# Altium PCB isg_adc_dac_test_board_top.PcbDoc
Units mil, origin at the board's own origin, x right, y up, seen from the top; angles counter-clockwise.
Board outline 3000 x 3000 mil, 4 copper layers (Top Layer, MidLayer Upper, MidLayer Lower, Bottom Layer), stack 23.756 mil thick; 95 components, 50 nets, 273 pads, 94 vias.
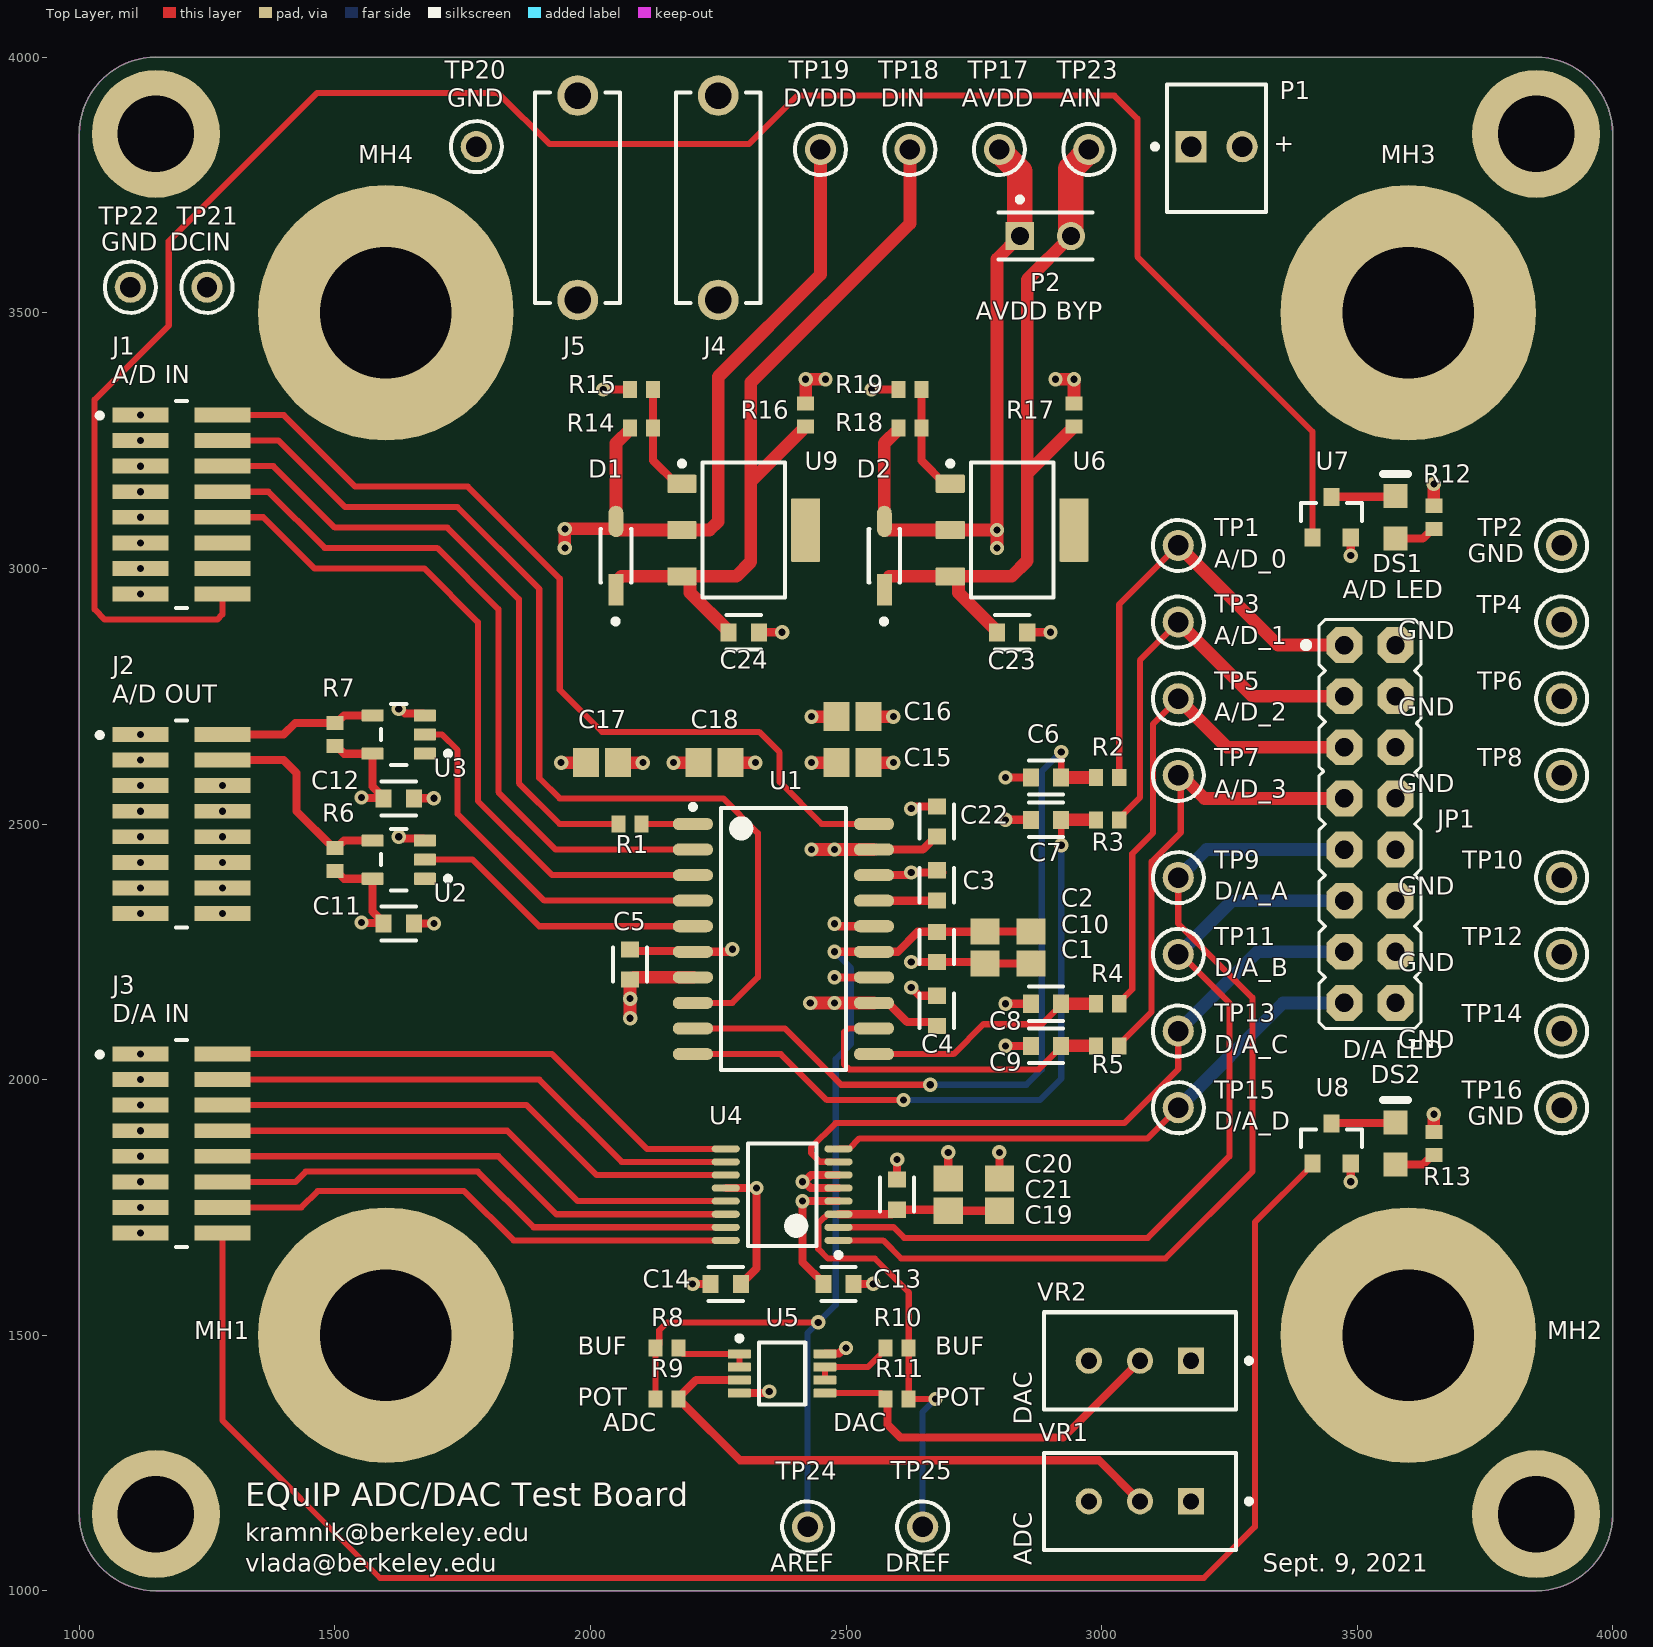
[diagram p0: Top Layer view]
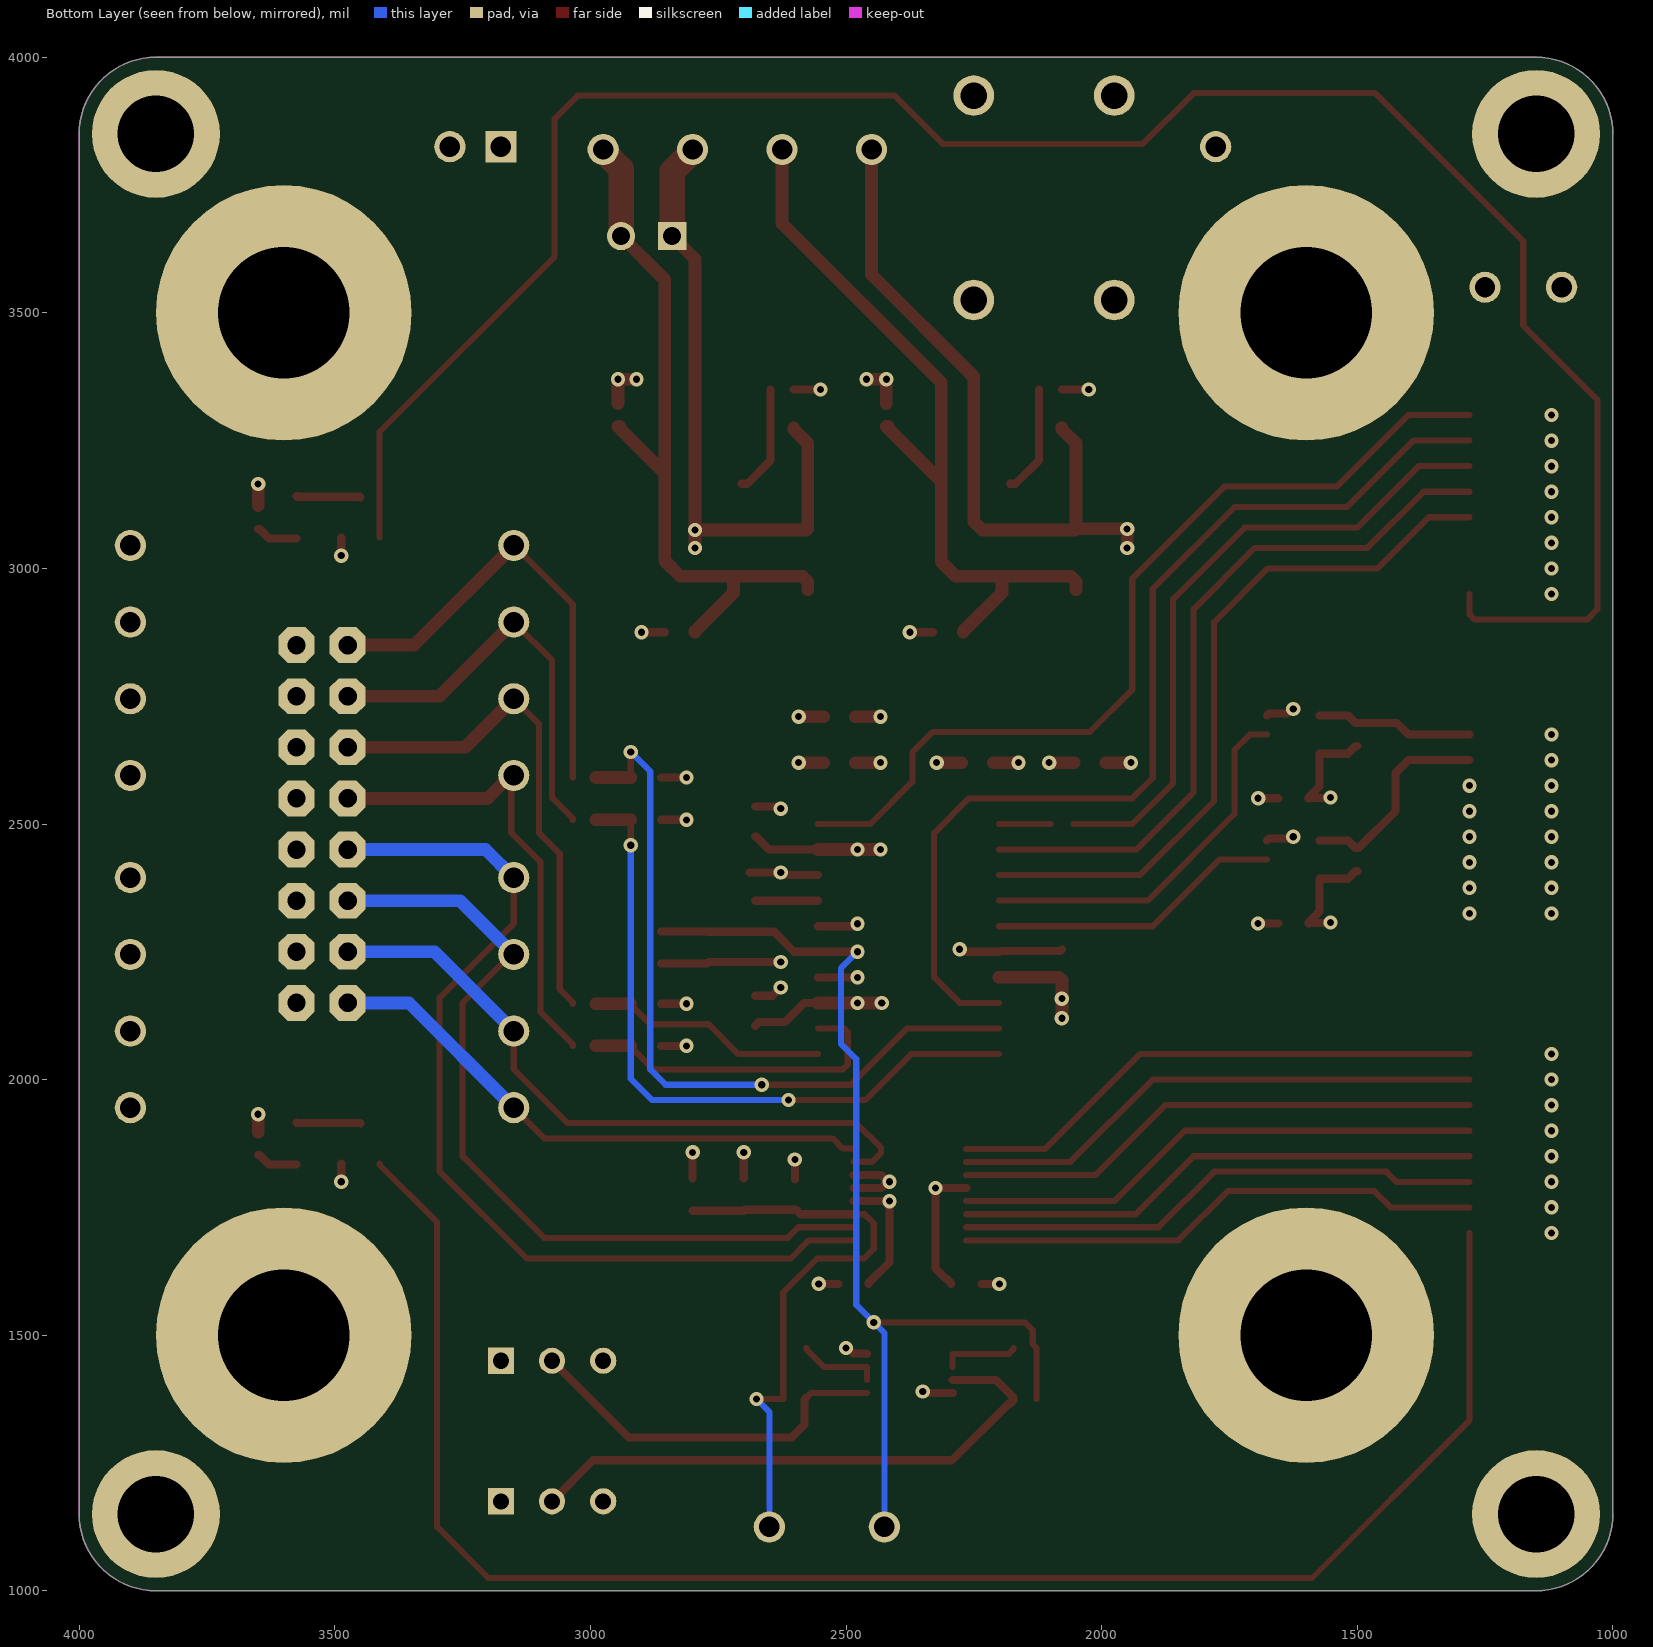
[diagram p1: Bottom Layer view, seen from below]
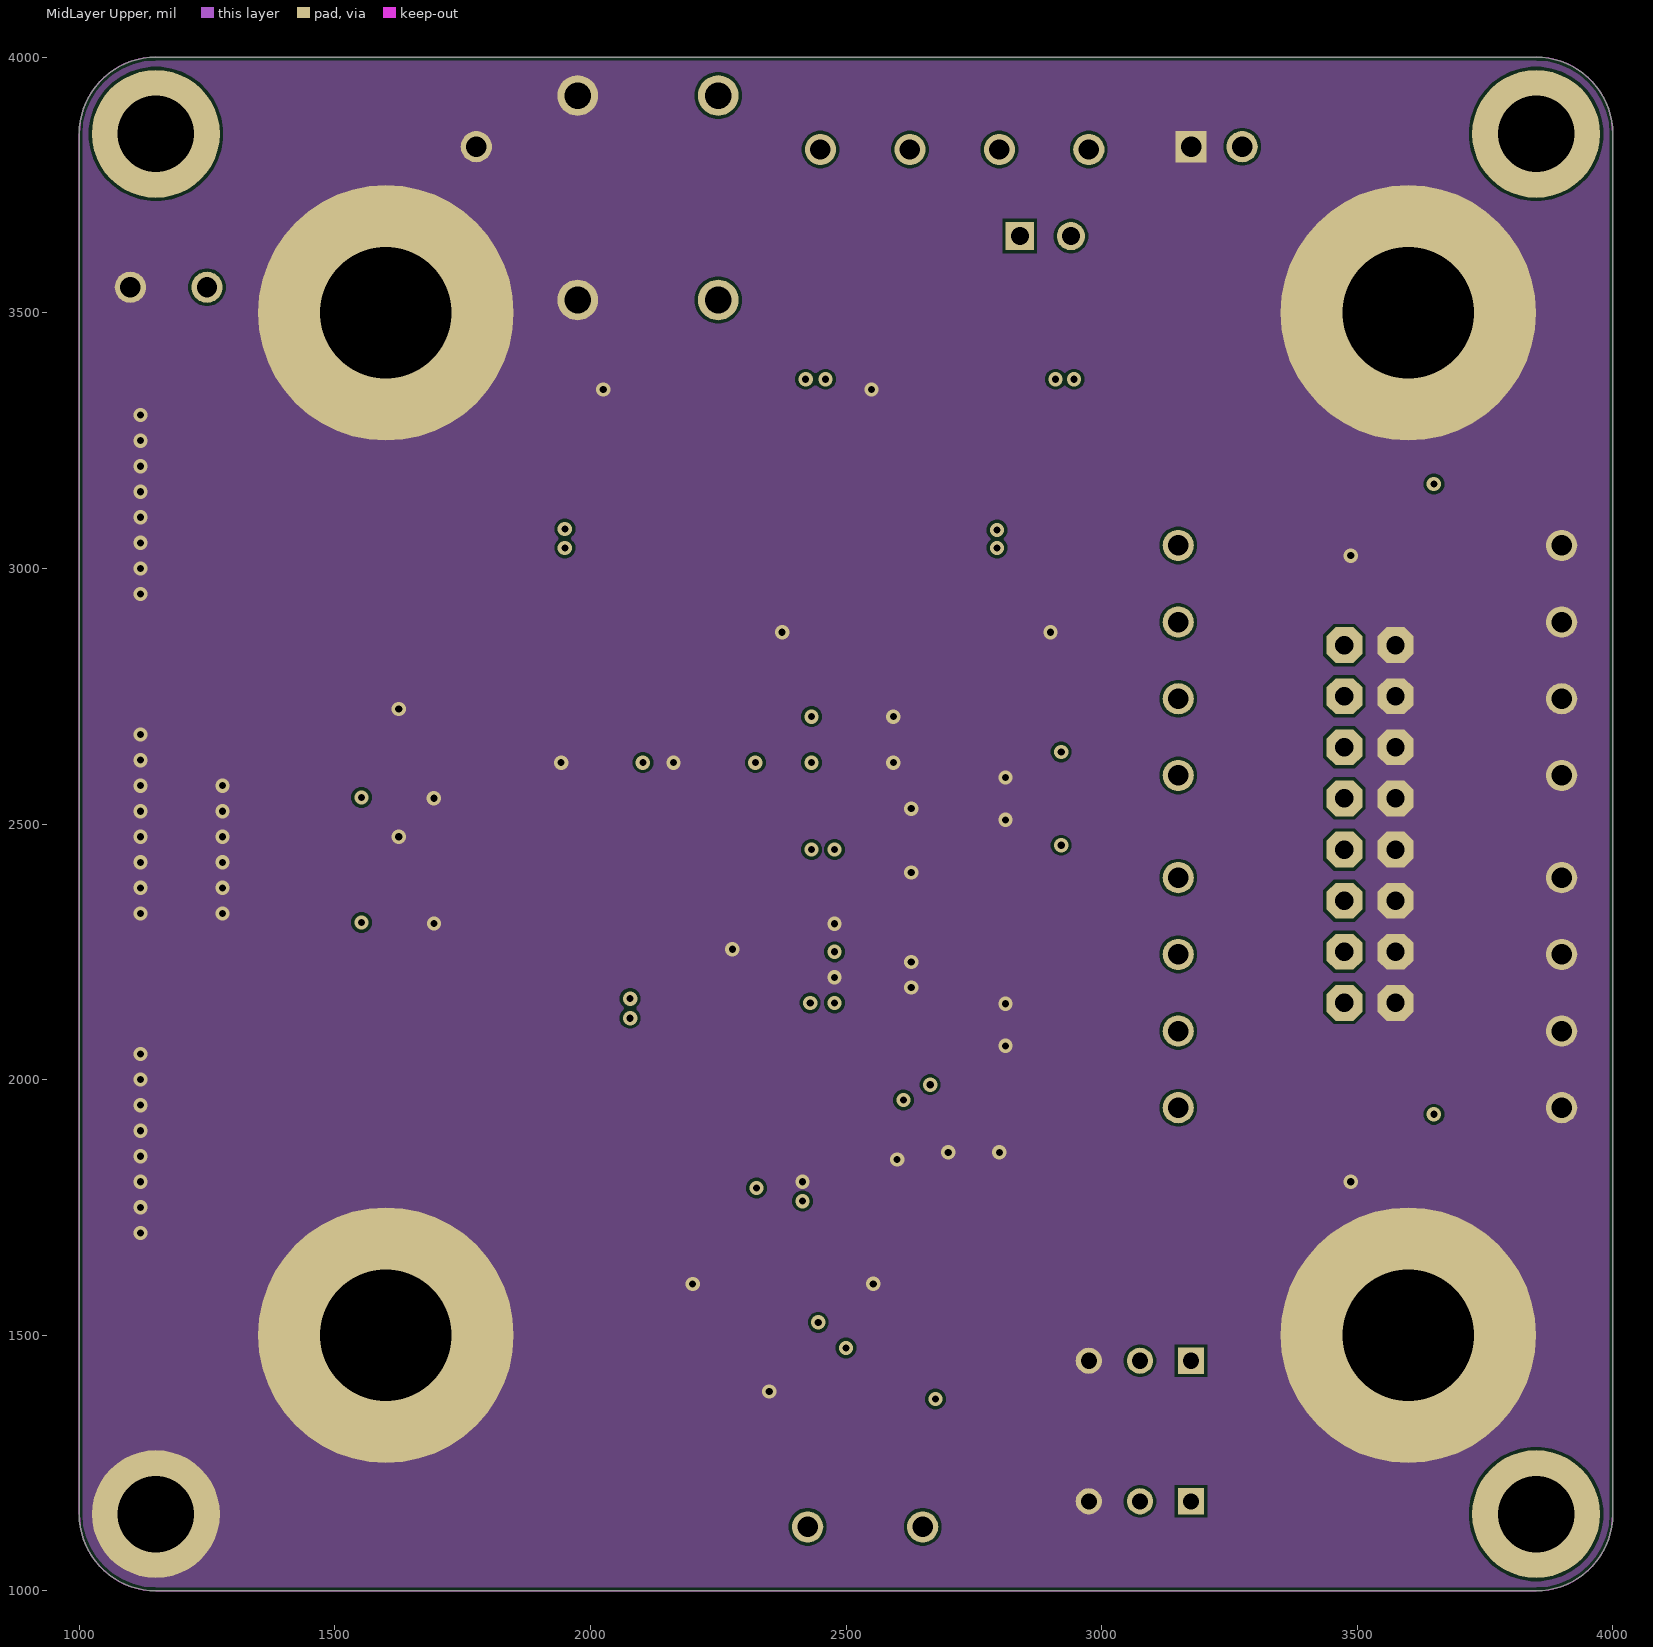
[diagram p2: MidLayer Upper]
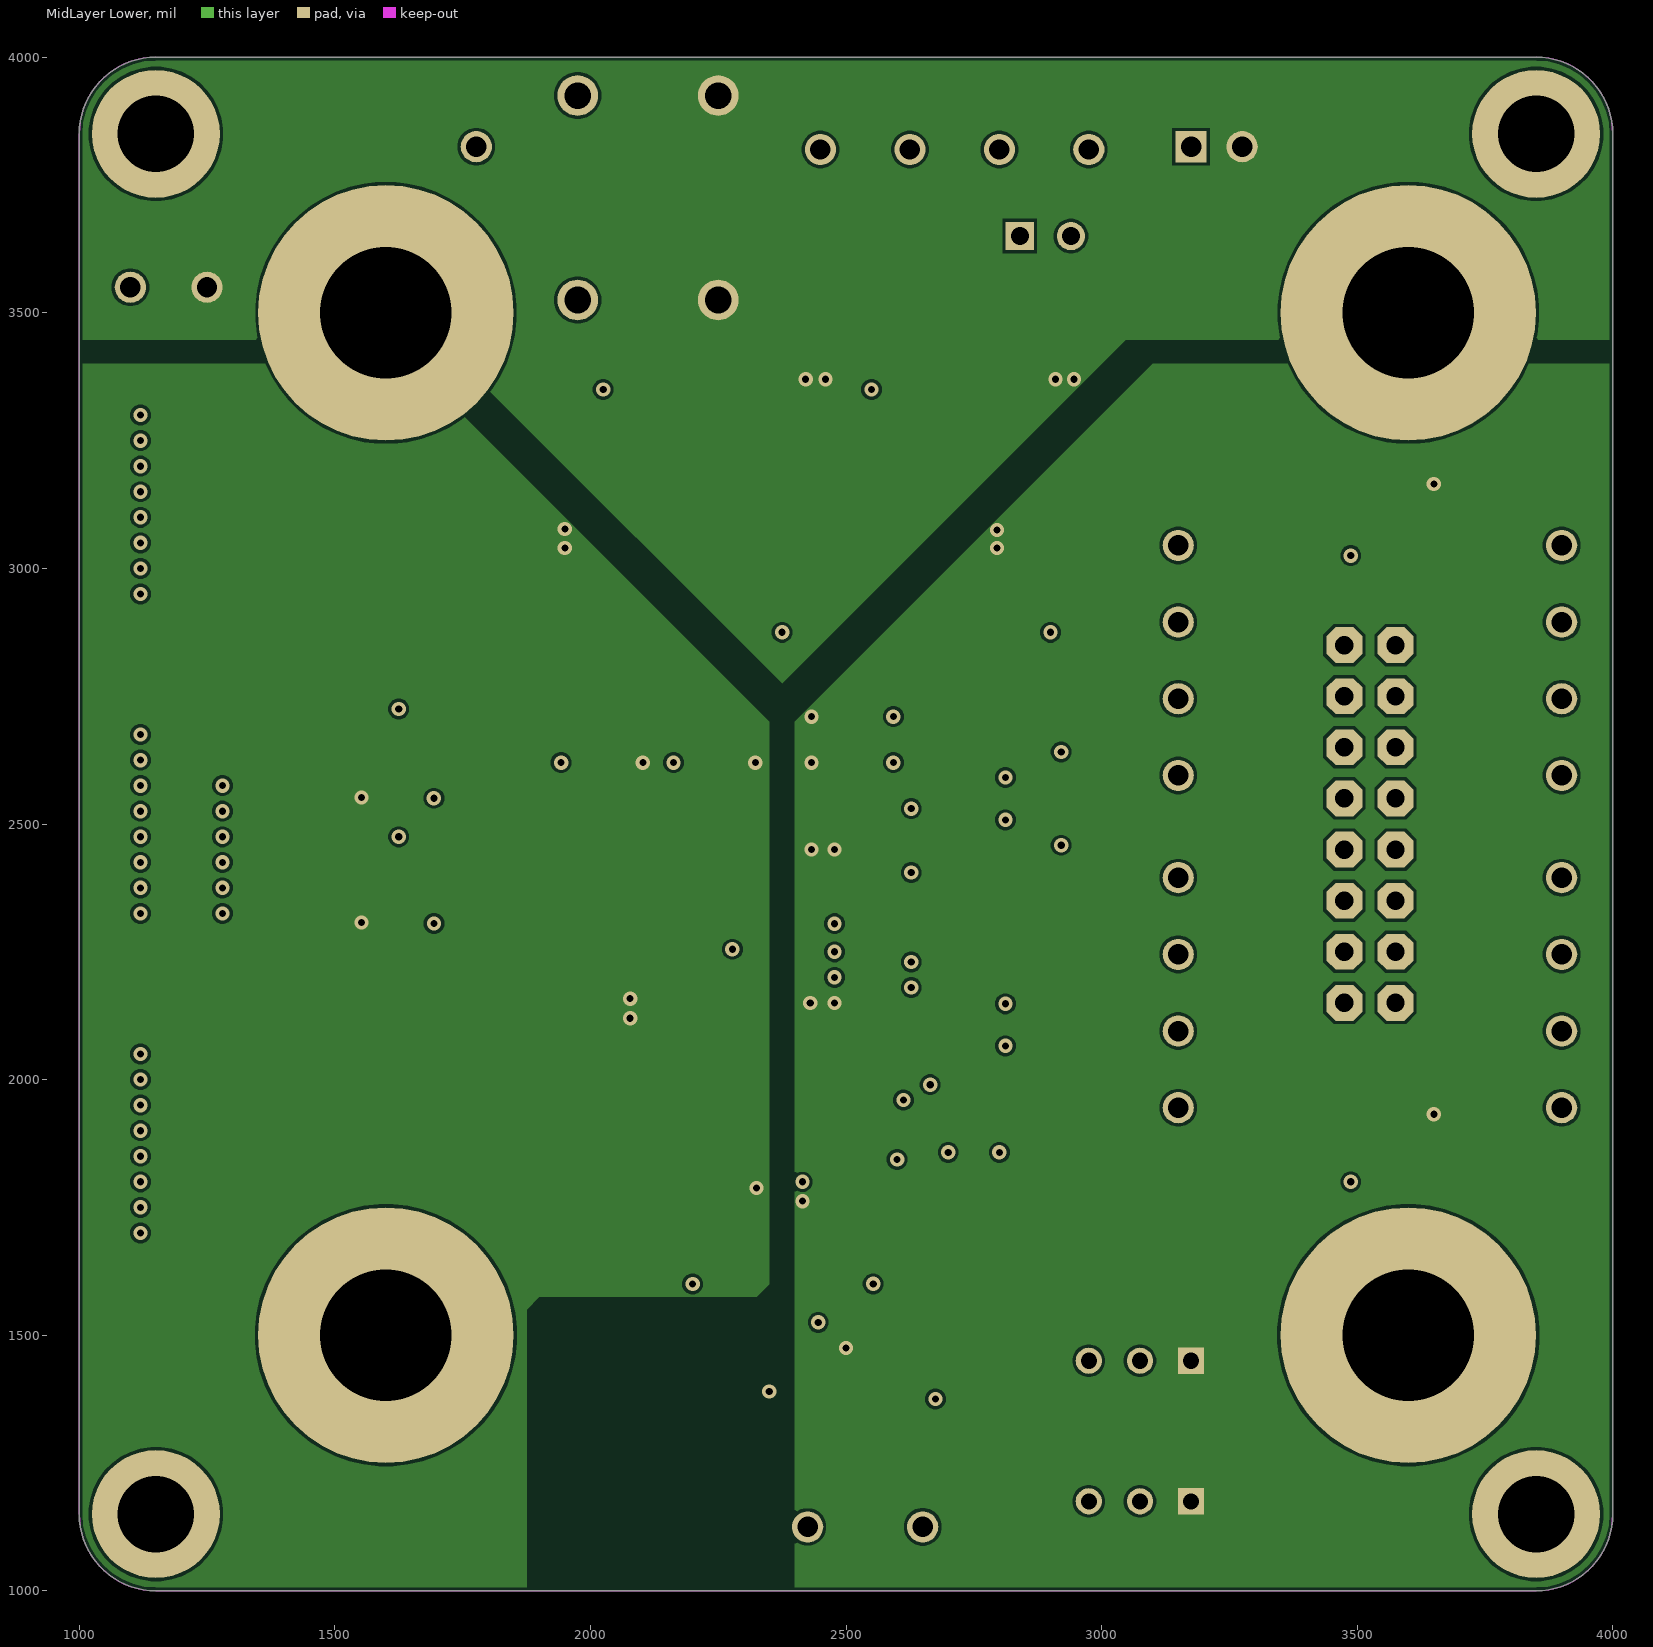
[diagram p3: MidLayer Lower]
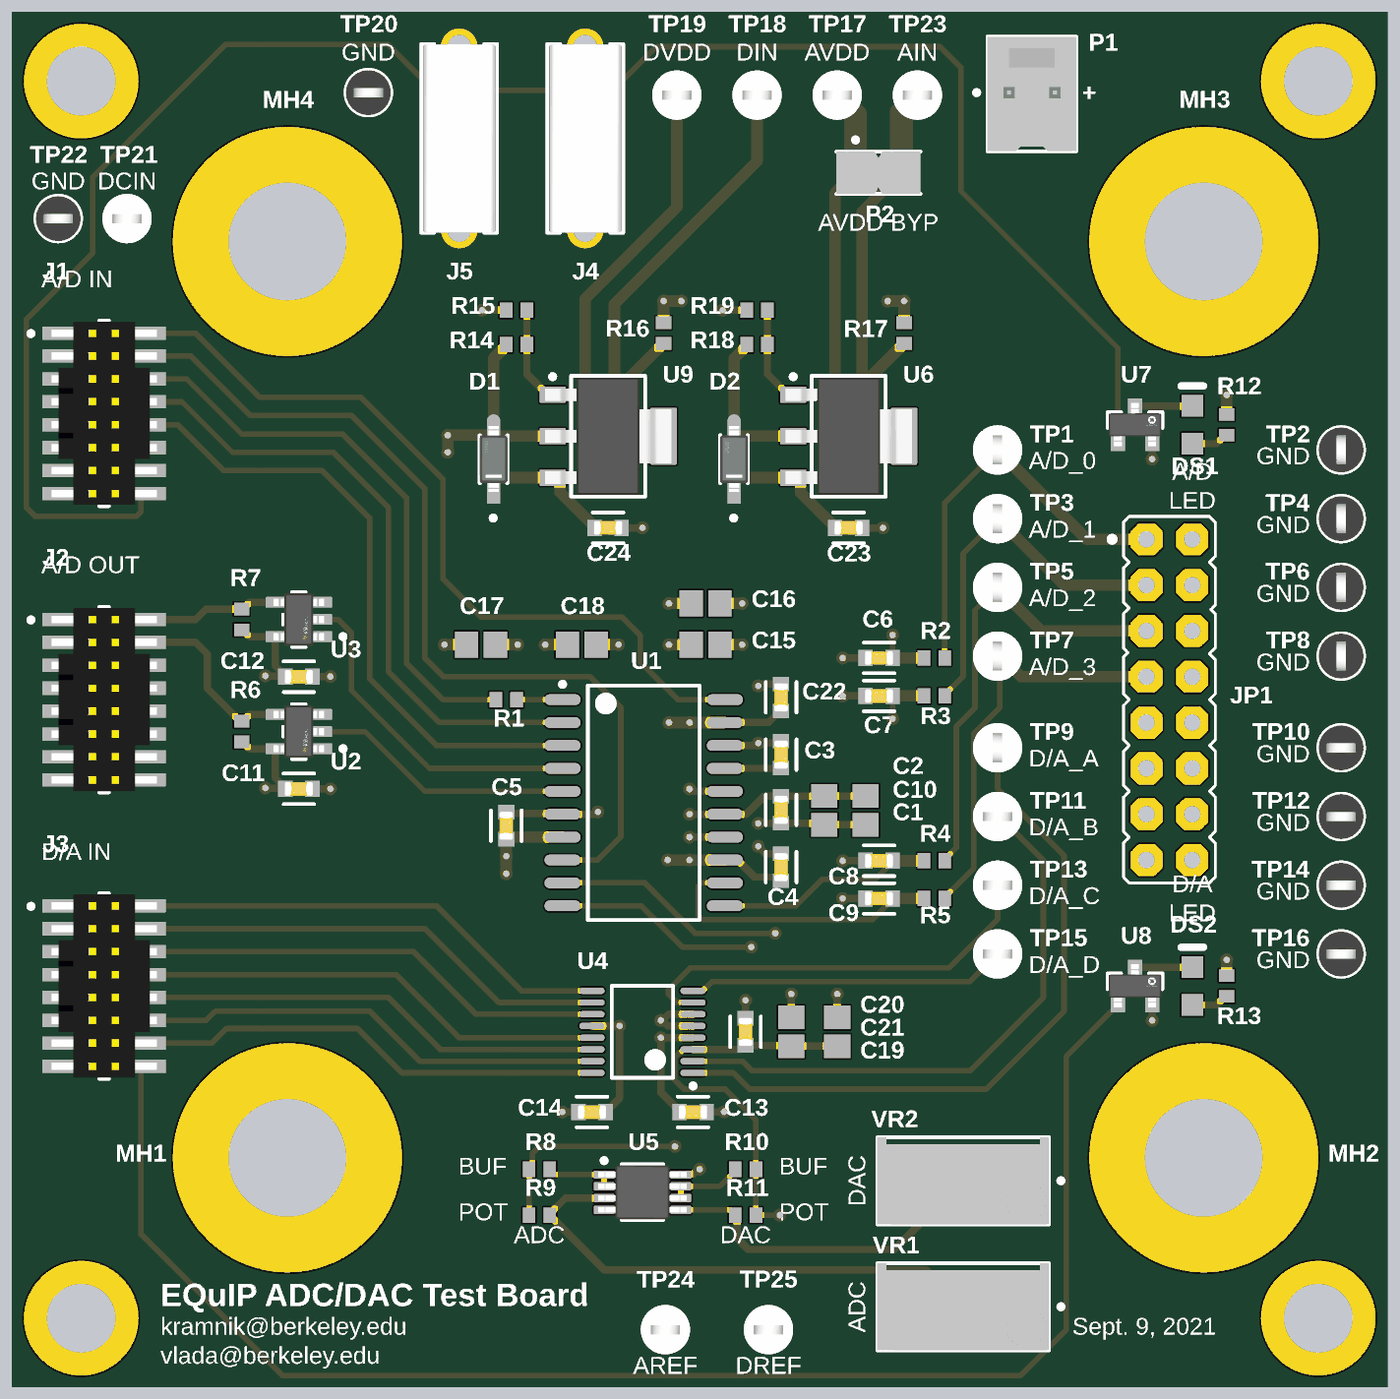
[diagram p4: 3D render of the assembled board from above, using the file's embedded part models]

## Layer stack, top to bottom
Top Solder: solder mask 0.4, Solder Resist, Dk 3.5
Top Layer: signal copper 1.4
Dielectric 2: prepreg 2.8, PP-006, Dk 4.1
MidLayer Upper: signal copper 1.378
Dielectric 1: dielectric 12.6, FR-4, Dk 4.8
MidLayer Lower: signal copper 1.378
Dielectric 3: prepreg 2.8, PP-006, Dk 4.1
Bottom Layer: signal copper 1.4
Bottom Solder: solder mask 0.4, Solder Resist, Dk 3.5

## Board outline
1150,4000 ccw(c1150,3850) 1000,3850 1000,1150 ccw(c1150,1150) 1150,1000 3850,1000 ccw(c3850,1150) 4000,1150 4000,3850 ccw(c3850,3850) 3850,4000

## Design rules (kind name [scope] priority, off if disabled: settings)
Clearance [All] p1: gap=6 ignorepadtopadclearanceinfootprint=FALSE
HoleSize [All] p1: absolutevalues=TRUE maxlimit=1000 minlimit=11.81 maxpercent=80.000 minpercent=20.000
PlaneConnect [All] p1: planeconnectstyle=Direct reliefexpansion=20 reliefentries=4 reliefconductorwidth=10 reliefairgap=10
PolygonConnect [All] p1: connectstyle=Direct reliefconductorwidth=10 reliefentries=4 polygonreliefangle="90 Angle" airgapwidth=10
RoutingVias [All] p1: holewidth=28 width=50 viastyle="Through Hole" minholewidth=28 minwidth=50 maxholewidth=28 maxwidth=50
SolderMaskExpansion [All] p1: expansion=4 istentingtop=FALSE
Width [All] p1: maxlimit=100 minlimit=8 preferedwidth=16
28 further rules are at their usual default settings.

## Components (designator, comment, footprint, x,y, rotation, side; value= is the part's Value field where it differs from the comment)
C1 "CAP CER 0.1uF 50V X7R 0603" FP-CC0603-DA-MFG 2677.68,2259.53 r270 top value="100 nF"
C2 "CAP CER 10uF 0805 10V X7R" CAPC2013X140X50NL20T25 2861.93,2258.35 r270 top
C3 "CAP CER 0.1uF 50V X7R 0603" FP-CC0603-DA-MFG 2677.68,2380 r90 top value="100 nF"
C4 "CAP CER 0.1uF 50V X7R 0603" FP-CC0603-DA-MFG 2677.68,2134.53 r90 top value="100 nF"
C5 "CAP CER 0.1uF 50V X7R 0603" FP-CC0603-DA-MFG 2077.68,2225 r90 top value="100 nF"
C6 "CAP CER 0.027uF 50V X7R 0603" FP-CC0603-DA-MFG 2891.46,2591.02 r180 top value="100 nF"
C7 "CAP CER 0.027uF 50V X7R 0603" FP-CC0603-DA-MFG 2891.46,2508.15 r180 top value="100 nF"
C8 "CAP CER 0.027uF 50V X7R 0603" FP-CC0603-DA-MFG 2891.46,2148.31 r180 top value="100 nF"
C9 "CAP CER 0.027uF 50V X7R 0603" FP-CC0603-DA-MFG 2891.46,2066.02 r180 top value="100 nF"
C10 "CAP CER 1uF 0805 16V X7R" CAPC2013X140X50NL20T25 2771.85,2258.35 r270 top
C11 "CAP CER 0.1uF 50V X7R 0603" FP-CC0603-DA-MFG 1625,2305.32 r0 top value="100 nF"
C12 "CAP CER 0.1uF 50V X7R 0603" FP-CC0603-DA-MFG 1625,2550 r0 top value="100 nF"
C13 "CAP CER 0.1uF 50V X7R 0603" FP-CC0603-DA-MFG 2485.24,1600 r0 top value="100 nF"
C14 "CAP CER 0.1uF 50V X7R 0603" FP-CC0603-DA-MFG 2264.76,1600 r180 top value="100 nF"
C15 "CAP CER 1uF 0805 16V X7R" CAPC2013X140X50NL20T25 2512.68,2620 r0 top
C16 "CAP CER 10uF 0805 10V X7R" CAPC2013X140X50NL20T25 2512.68,2710 r0 top
C17 "CAP CER 1uF 0805 16V X7R" CAPC2013X140X50NL20T25 2022.68,2620 r180 top
C18 "CAP CER 10uF 0805 10V X7R" CAPC2013X140X50NL20T25 2242.68,2620 r180 top
C19 "CAP CER 0.1uF 50V X7R 0603" FP-CC0603-DA-MFG 2600,1775 r90 top value="100 nF"
C20 "CAP CER 1uF 0805 16V X7R" CAPC2013X140X50NL20T25 2800,1775 r90 top
C21 "CAP CER 10uF 0805 10V X7R" CAPC2013X140X50NL20T25 2700,1775 r90 top
C22 "CAP CER 0.1uF 50V X7R 0603" FP-CC0603-DA-MFG 2677.68,2505 r90 top value="100 nF"
C23 "CAP CER 0.1uF 50V X7R 0603" FP-CC0603-DA-MFG 2825,2875 r0 top value="100 nF"
C24 "CAP CER 0.1uF 50V X7R 0603" FP-CC0603-DA-MFG 2300,2875 r0 top value="100 nF"
D1 "1N5819HW-7-F" FP-SOD123-IPC_A 2050,3025 r90 top
D2 "1N5819HW-7-F" FP-SOD123-IPC_A 2575,3025 r90 top
DS1 "HSMG-C170" AVAG-HSMX-C170_V 3575,3100 r90 top
DS2 "HSMG-C170" AVAG-HSMX-C170_V 3575,1875 r90 top
J1 "FTSH-108-02-F-DV" FP-FTSH-108-02-F-DV-MFG 1200,3125 r270 top
J2 "FTSH-108-02-F-DV" FP-FTSH-108-02-F-DV-MFG 1200,2500 r270 top
J3 "FTSH-108-02-F-DV" FP-FTSH-108-02-F-DV-MFG 1200,1875 r270 top
J4 "105-0752-001" FP-105-0751-001-MFG 2250,3725 r90 top
J5 "105-0753-001" FP-105-0751-001-MFG 1975,3725 r270 top
JP1 "PIN_HEADER_2X8" PIN_HEADER_2X8_2.54MM 3525,2500 r0 top
MH1 "OPTICAL-MOUNT-HOLE-1/4-20" MH-1/4-20 1600,1500 r0 top
MH2 "OPTICAL-MOUNT-HOLE-1/4-20" MH-1/4-20 3600,1500 r0 top
MH3 "OPTICAL-MOUNT-HOLE-1/4-20" MH-1/4-20 3600,3500 r0 top
MH4 "OPTICAL-MOUNT-HOLE-1/4-20" MH-1/4-20 1600,3500 r0 top
P1 "22-23-2021" MOLX-22-23-2021_V 3225,3825 r0 top
P2 "5-146280-2" TECO-5-146280-2_V 2890,3650 r0 top
R1 "RES SMD 33 OHM 0603" RESC1609X50X30LL10T20 2077.68,2500 r0 top
R2 "RES SMD 33 OHM 0603" RESC1609X50X30LL10T20 3011.93,2591.02 r0 top
R3 "RES SMD 33 OHM 0603" RESC1609X50X30LL10T20 3011.93,2508.15 r0 top
R4 "RES SMD 33 OHM 0603" RESC1609X50X30LL10T20 3011.93,2148.31 r0 top
R5 "RES SMD 33 OHM 0603" RESC1609X50X30LL10T20 3011.93,2066.02 r0 top
R6 "RES SMD 100 OHM 0603" RESC1609X50X30LL10T20 1500,2430.32 r270 top
R7 "RES SMD 100 OHM 0603" RESC1609X50X30LL10T20 1500,2675 r270 top
R8 "RES SMD 0 OHM 0603" RESC1609X50X30LL10T20 2150,1475 r0 top
R9 "DNP" RESC1609X50X30LL10T20 2150,1375 r0 top
R10 "RES SMD 0 OHM 0603" RESC1609X50X30LL10T20 2600,1475 r180 top
R11 "DNP" RESC1609X50X30LL10T20 2600,1375 r180 top
R12 "RES SMD 100 OHM 0603" RESC1609X50X30LL10T20 3650,3100 r90 top
R13 "RES SMD 100 OHM 0603" RESC1609X50X30LL10T20 3650,1875 r90 top
R14 "RES SMD 240 OHM 0603" RESC1609X50X30LL10T20 2100,3275 r180 top
R15 "RES SMD 100 OHM 0603" RESC1609X50X30LL10T20 2100,3350 r0 top
R16 "RES SMD 0 OHM 0603" RESC1609X50X30LL10T20 2421.06,3300 r270 top
R17 "RES SMD 0 OHM 0603" RESC1609X50X30LL10T20 2946.06,3300 r270 top
R18 "RES SMD 240 OHM 0603" RESC1609X50X30LL10T20 2625,3275 r180 top
R19 "RES SMD 100 OHM 0603" RESC1609X50X30LL10T20 2625,3350 r0 top
TP1 "5002" KSTN-5002 3150,3045 r0 top
TP2 "5001" KSTN-5001 3900,3045 r0 top
TP3 "5002" KSTN-5002 3150,2895 r0 top
TP4 "5001" KSTN-5001 3900,2895 r0 top
TP5 "5002" KSTN-5002 3150,2745 r0 top
TP6 "5001" KSTN-5001 3900,2745 r0 top
TP7 "5002" KSTN-5002 3150,2595 r0 top
TP8 "5001" KSTN-5001 3900,2595 r0 top
TP9 "5002" KSTN-5002 3150,2395 r0 top
TP10 "5001" KSTN-5001 3900,2395 r90 top
TP11 "5002" KSTN-5002 3150,2245 r90 top
TP12 "5001" KSTN-5001 3900,2245 r90 top
TP13 "5002" KSTN-5002 3150,2095 r90 top
TP14 "5001" KSTN-5001 3900,2095 r90 top
TP15 "5002" KSTN-5002 3150,1945 r90 top
TP16 "5001" KSTN-5001 3900,1945 r90 top
TP17 "5002" KSTN-5002 2800,3819.49 r90 top
TP18 "5002" KSTN-5002 2625,3819.49 r90 top
TP19 "5002" KSTN-5002 2450,3819.49 r90 top
TP20 "5001" KSTN-5001 1776.78,3825 r90 top
TP21 "5002" KSTN-5002 1250,3550 r90 top
TP22 "5001" KSTN-5001 1100,3550 r90 top
TP23 "5002" KSTN-5002 2975,3819.49 r90 top
TP24 "5002" KSTN-5002 2425,1125 r90 top
TP25 "5002" KSTN-5002 2650,1125 r90 top
U1 "TLC2574IDW" TI-DW20_L 2377.68,2275 r0 top
U2 "SN74LVC1G07DBVT" FP-DBV0005A-MFG 1625,2430.32 r180 top
U3 "SN74LVC1G07DBVT" FP-DBV0005A-MFG 1625,2675 r180 top
U4 "DAC8555IPWG4" TI-PW16_L 2375,1775 r180 top
U5 "LM8272MM" DGK0008A_L 2375,1425 r0 top
U6 "LM317EMP/NOPB" DCY0004A_L 2825,3075 r0 top
U7 "NUD3160LT1G" FP-318-08-MFG 3450,3100 r90 top
U8 "NUD3160LT1G" FP-318-08-MFG 3450,1875 r90 top
U9 "LM317EMP/NOPB" DCY0004A_L 2300,3075 r0 top
VR1 "3296W-1-103LF" BOUR-3296W 3075,1175 r180 top
VR2 "3296W-1-103LF" BOUR-3296W 3075,1450 r180 top

## Footprints (in the part's own frame and the unit in brackets; to place one, negate y for a bottom-side part, rotate by r counter-clockwise, add the part's x,y. Pads: shape width x height; smd on the part's side, far side on the other; paste and mask are expansions set on the pad)
AVAG-HSMX-C170_V [mm] "SMD, 2-Leads, Body 2x1.25mm, Height 0.8mm"
  rect 1.2x1.2 smd: 1(-1.05,0) 2(1.05,0)
  silkscreen extent 2.15,-0.63 2.15,0.63, body extent -1,-0.63 1,0.63, height 0.8
BOUR-3296W [mm] "THD, 3-Leads, Body 9.53x4.83mm, Pitch 2.54mm"
  rect 1.3x1.3 hole 0.8: 1(-2.54,0)
  round 1.3 hole 0.8: 2(0,0) 3(2.54,0)
  silkscreen extent -5.54,-2.41 4.76,2.42, body extent -4.76,-2.4 4.76,2.42, height 11.55
CAPC2013X140X50NL20T25 [mm] "Chip Capacitor, 2-Leads, Body 2.00x1.25mm, IPC Medium Density"
  rect 1.3x1.45 smd: 1(-0.8,0) 2(0.8,0)
  body extent -1.1,-0.72 1.1,0.72, height 1.4
DCY0004A_L [mm] "SOT223, 4-Leads, Body 6.7x3.7mm, Pitch 2.3mm, IPC High Density"
  rrect11% 1.45x0.9 smd: 1(-3.075,2.3) 2(-3.075,0) 3(-3.075,-2.3)
  rrect7% 1.45x3.15 smd: 4(3.075,0)
  silkscreen extent -3.2,-3.35 2.05,3.42, body extent -3.5,-3.25 3.5,3.25, height 1.62
DGK0008A_L [mm] "TSOP, 8-Leads, Body 3.1x3.1mm, Pitch 0.65mm, IPC High Density"
  rrect22% 1.15x0.45 smd: 1(-2.125,0.975) 2(-2.125,0.325) 3(-2.125,-0.325) 4(-2.125,-0.975) 5(2.125,-0.975) 6(2.125,-0.325) 7(2.125,0.325) 8(2.125,0.975)
  silkscreen extent -2.25,-1.55 1.15,1.87, body extent -2.45,-1.5 2.45,1.5, height 0.94
FP-105-0751-001-MFG [mil]
  round 79.56 hole 52 paste-39370.1 mask+0: 1(-200,0) 1(200,0)
  silkscreen extent -206,-83 206,83, body extent -244,-87 244,87, height 10
FP-318-08-MFG [mm]
  rect 0.9x0.8 smd paste+0 mask+0: 1(-1,0.95) 2(-1,-0.95) 3(1,0)
  silkscreen extent -0.18,-1.52 0.7,1.52, body extent -1.55,-1.62 1.55,1.62, height 0.25
FP-CC0603-DA-MFG [mm]
  rect 0.8x0.9 smd paste+0 mask+0: 1(-0.75,0) 2(0.75,0)
  silkscreen extent -0.85,-0.85 0.85,0.85, body extent -1.35,-0.75 1.35,0.75, height 0.25
FP-DBV0005A-MFG [mm]
  rrect17% 1.1x0.6 smd paste+0 mask+0: 1(-1.3,0.95) 2(-1.3,0) 3(-1.3,-0.95) 4(1.3,-0.95) 5(1.3,0.95)
  silkscreen extent -2.58,-1.53 0.87,1.53, body extent -1.95,-1.78 1.95,1.78, height 0.25
FP-FTSH-108-02-F-DV-MFG [mm]
  rect 0.74x2.79 smd paste+0 mask+0: 1(-4.445,-2.035) 2(-4.445,2.035) 3(-3.175,-2.035) 4(-3.175,2.035) 5(-1.905,-2.035) 6(-1.905,2.035) 7(-0.635,-2.035) 8(-0.635,2.035) 9(0.635,-2.035) 10(0.635,2.035) 11(1.905,-2.035) 12(1.905,2.035) 13(3.175,-2.035) 14(3.175,2.035) 15(4.445,-2.035) 16(4.445,2.035)
  silkscreen extent -5.15,-4.18 5.15,0.27, body extent -5.25,-3.53 5.25,3.53, height 0.25
FP-SOD123-IPC_A [mil]
  rect 61.32x29.23 smd paste+0 mask+0: 1(-66.94,0)
  rrect100% 61.32x29.23 smd paste+0 mask+0: 2(66.94,0)
  silkscreen extent -134,-31 52,31, body extent -117,-50 117,50, height 10
KSTN-5001 [mm] "Test Point, Through Hole, Dia 2.54mm"
  round 1.55 hole 1.016: 1(0,0)
  silkscreen extent -1.27,-1.27 1.27,1.27, body extent -1.25,-1.25 1.25,1.25, height 4.62
KSTN-5002 [mm] "Test Point, Through Hole, Dia 2.54mm"
  round 1.55 hole 1.016: 1(0,0)
  silkscreen extent -1.27,-1.27 1.27,1.27, body extent -1.25,-1.25 1.25,1.25, height 4.62
MH-1/4-20 [mil]
  round 500 hole 257: PAD(0,0)
MOLX-22-23-2021_V [mm] "THD, 2-Leads, Body 6.35x4.93mm, Pitch 2.54mm"
  rect 1.55x1.55 hole 1.02: 1(-1.27,0)
  round 1.55 hole 1.02: 2(1.27,0)
  silkscreen extent -3.19,-3.25 2.46,3.1, body extent -2.46,-3.25 2.46,3.1, height 10.66
PIN_HEADER_2X8_2.54MM [mil]
  oct 70x70 hole 36: 1(-50,350) 2(50,350) 3(-50,250) 4(50,250) 5(-50,150) 6(50,150) 7(-50,50) 8(50,50) 9(-50,-50) 10(50,-50) 11(-50,-150) 12(50,-150) 13(-50,-250) 14(50,-250) 15(-50,-350) 16(50,-350)
  silkscreen extent -131,-400 100,400
RESC1609X50X30LL10T20 [mm] "Chip Resistor, 2-Leads, Body 1.55x0.85mm, IPC High Density"
  rect 0.7x0.85 smd: 1(-0.575,0) 2(0.575,0)
  body extent -0.82,-0.48 0.82,0.48, height 0.5
TECO-5-146280-2_V [mm] "Connector, 2-Leads, Body 4.67x2.34mm, Pitch 2.54mm"
  rect 1.4x1.4 hole 0.89: 1(-1.27,0)
  round 1.4 hole 0.89: 2(1.27,0)
  silkscreen extent -2.33,-1.17 2.33,1.94, body extent -2.34,-1.17 2.34,1.17, height 5.33
TI-DW20_L [mm] "SOIC, 20-Leads, Body 12.8x7.5mm, Pitch 1.27mm, IPC High Density"
  oval 2x0.6 smd: 1(-4.5,5.715) 2(-4.5,4.445) 3(-4.5,3.175) 4(-4.5,1.905) 5(-4.5,0.635) 6(-4.5,-0.635) 7(-4.5,-1.905) 8(-4.5,-3.175) 9(-4.5,-4.445) 10(-4.5,-5.715) 11(4.5,-5.715) 12(4.5,-4.445) 13(4.5,-3.175) 14(4.5,-1.905) 15(4.5,-0.635) 16(4.5,0.635) 17(4.5,1.905) 18(4.5,3.175) 19(4.5,4.445) 20(4.5,5.715)
  silkscreen extent -4.62,-6.5 3.1,6.69, body extent -3.8,-6.5 3.8,6.5, height 2.65
TI-PW16_L [mm] "SOP, 16-Leads, Body 5x4.4mm, Pitch 0.65mm, IPC High Density"
  oval 1.4x0.35 smd: 1(-2.8,2.275) 2(-2.8,1.625) 3(-2.8,0.975) 4(-2.8,0.325) 5(-2.8,-0.325) 6(-2.8,-0.975) 7(-2.8,-1.625) 8(-2.8,-2.275) 9(2.8,-2.275) 10(2.8,-1.625) 11(2.8,-0.975) 12(2.8,-0.325) 13(2.8,0.325) 14(2.8,0.975) 15(2.8,1.625) 16(2.8,2.275)
  silkscreen extent -2.93,-2.55 1.7,3.12, body extent -2.25,-2.55 2.25,2.55, height 1.2

## Part data
C1 C3 C4 C5 C6 C7 C8 C9 C11 C12 C13 C14 C19 C22 C23 C24: library part CMP-03422-000030-1, Capacitance="100 nF", Manufacturer=YAGEO, Manufacturer Part Number=CC0603KRX7R7BB104, Package=CC0603-DA, Temperature="-55°C to +125°C", Temperature Characteristic=X7R, Temperature Coefficient=15%, Temperature Range High=+125°C, Temperature Range Low=-55°C, Tolerance=0.1, Voltage="16 V", Automotive=No, Category=Cap, ComponentLink2Description=Datasheet, ComponentLink2URL=http://www.yageo.com/documents/recent/UPY-GPHC_X7R_6.3V-to-50V_18.pdf, Device Class L1="Passive Components", Device Class L2=Capacitors, Device Class L3="Ceramic Capacitors", Digikey Description="CAP CER 0.1UF 16V X7R 0603", Footprint Url=http://www.yageo.com/exep/pages/download/literatures/UPY-C_GEN_24.pdf, Height=0.9mm, Lead Free=Yes, Material=Ceramic, Mouser Description="Multilayer Ceramic Capacitor, CC Series, 0.1 - F, - 10%, X7R, 16 V, 0603 [1608 Metric]", Octopart=https://octopart.com/cc0603krx7r7bb104-yageo-192941, RoHS=TRUE, Voltage Rating="16 V"
C2 C10 C15 C16 C17 C18 C20 C21: library part CMP-2007-04677-1, Manufacturer="AVX Interconnect / Elco", Part Number=0805ZC475KAT2A
D1 D2: library part CMP-0303-00003-3, "DIODE SCHOTTKY 40V 1A SOD123", Average Rectified Current=1A, Capacitance=110pF, Case/Package=SOD-123-2, Forward Voltage=450mV, Max Forward Surge Current (Ifsm)=25A, Max Operating Temperature=125°C, Max Power Dissipation=450mW, Max Repetitive Reverse Voltage (Vrrm)=40V, Min Operating Temperature=-65°C, Package Quantity=3000, Peak Reverse Current=50uA, Contact Plating=Tin, Current Rating=1A, Element Configuration=Single, Forward Current=1A, Height=1.25mm, Lead Free="Lead Free", Length=2.85mm, Max Reverse Voltage (DC)=40V, Number of Pins=2, Output Current=1A, Packaging="Tape and Reel", Peak Non-Repetitive Surge Current=25A, Polarity=Standard, Radiation Hardening=No, REACH SVHC="No SVHC", Termination=SMD/SMT, Voltage Rating (DC)=40V, Weight=0.000353oz, Width=1.7mm
DS1 DS2: library part CMP-2000-05062-1, "Chip LED, Green, 2.2 V, -40 to 85 degC, 2-Pin SMD, Pb-Free, Tape and Reel", Forward Current If=20mA, Forward Voltage=2.2V, Forward Voltage VF Max=2.6V, LED Colour=Green, Manufacturer=Avago, Operating Temperature Max=85degC, Operating Temperature Min=-30degC, Operating Temperature Range=-30degCto+85degC, Opto Case Style=SMD, Package Description="2-Pin Surface Mount Device, Body 2 x 1.25 mm, Height 0.8 mm", Package Reference=HSMX-C170, Storage Temperature Min=-40degC, Bulb Size=1.25mmx1.4mm, Datasheet URL=https://datasheet.ciiva.com/29280/180495-da-01-en-chip-led-hsmg-c170-gelb-gruen-29280971.pdf, Datasheet Version=Oct-08, Dominant Wavelength=572nm, Dominant Wavelength Typ=572nm, External Depth=0.8mm, External Length / Height=2mm, External Width=1.25mm, Forward Current If Max=20mA, LED Mounting=SMD, LED Type=Standard, Lens Shape=Rectangular, Light Area Height=1mm, Luminous Intensity=15mcd, Luminous Intensity Min=4mcd, Luminous Intensity Typ=15mcd, Manufacturer URL=http://www.avagotech.com/, Mounting Type=SMD, MSL=MSL2A-4weeks, No. of Pins=2, Opto Mounting Orientation=Top, Packaging=CutTape, Peak Forward Current=20mA, Peak Wavelength=570nm, PIV Max=5V, Storage Temperature Max=85degC, SVHC=NoSVHC(16-Jun-2014), Viewing Angle=170deg, Voltage Vf Typ=2.2V, Wavelength Typ=570nm
J1 J2 J3: library part CMP-02766-000080-1, "CONN HEADER SMD 16POS 1.27MM", Current Rating=3.4A, Manufacturer=Samtec, Temperature="-55°C to +125°C", Temperature Range High=+125°C, Temperature Range Low=-55°C, Automotive=No, Category=Conn, ComponentLink2Description=Datasheet, ComponentLink2URL=http://suddendocs.samtec.com/prints/ftsh-1xx-xx-xxx-dv-xxx-xxx-mkt.pdf, Conn Gender=Male, Conn Orientation=Vertical, Contact Material=Gold,Nickel, Device Class L1=Connectors, Device Class L2="Headers and Wire Housings", Device Class L3=unset, Digikey Description="CONN HEADER SMD 16POS 1.27MM", Footprint Url=http://suddendocs.samtec.com/prints/ftsh-1xx-xx-xxx-dv-xxx-footprint.pdf, Height=5.09mm, Lead Free=Yes, Manufacturer Part Number=FTSH-108-02-F-DV, Mouser Description="Conn Unshrouded Header HDR 16 POS 1.27mm Solder ST SMD Tube", Number of Contacts=16, Number of Rows=2, Octopart=https://octopart.com/ftsh-108-02-f-dv-samtec-10605893, Package=FTSH-108-02-F-DV, Pitch=1.27mm, RoHS=TRUE, Standoff Height=0.46mm
J4 J5: library part CMP-09586-000001-1, "CONN TIP JACK SOLDER WHITE", Current Rating=5A, Manufacturer="Cinch Connectivity", Manufacturer Part Number=105-0751-001, Temperature="-55°C to +75°C", Temperature Range High=+75°C, Temperature Range Low=-55°C, Voltage Rating=1500V, Automotive=No, Category=Conn, ComponentLink2Description=Datasheet, ComponentLink2URL=https://belfuse.com/resources/Johnson/drawings/dr-1050751001.pdf, Conn Orientation=Horizontal, Contact Material=Silver, Device Class L1=Connectors, Device Class L2=unset, Device Class L3=unset, Digikey Description="CONN TIP JACK SOLDER WHITE", Height=0.213inch, Is Female=yes, Lead Free=Yes, Number of Contacts=1, Octopart=https://octopart.com/105-0751-001-cinch+connectivity+solutions-51372833, Package=105-0751-001, Pitch=10.16mm, RoHS=TRUE
P1: library part CMP-1704-00001-3, "Male Header, Pitch 2.54 mm, 1 x 2 Position, Height 10.67 mm, Tail Length 3.56 mm, 0 to 75 degC, RoHS, Bulk", Max Operating Temperature="75 degC", Min Operating Temperature="0 degC", Package Quantity=3000, ComponentLink1Description="Manufacturer URL", ComponentLink1URL=http://www.molex.com/, ComponentLink2Description=Datasheet, ComponentLink2URL=https://datasheet.ciiva.com/19454/232266-19454304.pdf, Height="10.67 mm", Length="5.08 mm", Mount="Through Hole", Mounting Technology="Through Hole", PackageDescription="Male Header, Pitch 2.54 mm, 1 x 2 Position, Height 10.67 mm, Tail Length 3.56 mm", Packaging=Bulk, PartNumber=22-23-2021, Pins=2, Radiation Hardening=No, REACH SVHC=Unknown, RoHSCompliant=True, Width="6.35 mm"
P2: library part CMP-2000-07492-1, "Male Header, Pitch 2.54 mm, 1 x 2 Position, Height 8.21 mm, Tail Length 3.05 mm, -65 to 105 degC, RoHS, Bulk", Case\/Package=100, Colour=Black, Current Rating=3A, Flammability Rating=UL94V-0, High Temperature Housing=Yes, Manufacturer="TE Connectivity", Max Current Rating=5A, Max Operating Temperature=105degC, Min Operating Temperature=-65degC, Package Description="Male Header, Pitch 2.54 mm, 1 x 2 Position, Height 8.21 mm, Tail Length 3.05 mm", Package Quantity=500, Approvals=CSA, Board Standoff=No(Without), Connector Type=Header, Contact Gender=Male, Contact Material=CopperAlloy, Contact Mating Length=0.23inch, Contact Plating=Matte, Contact Protection=No(Without), Contact Shape=Square, Datasheet URL=http://www.te.com/commerce/DocumentDelivery/DDEController?Action=showdoc&DocId=Customer+Drawing%7F146280%7FH1%7Fpdf%7FEnglish%7FENG_CD_146280_H1.pdf%7F5-146280-2, Datasheet Version="Rev. H1, 08/2016", Depth=2.34mm, Gasket=No(Without), High Speed Serial Data Connector=No, Housing Colour=Black, Housing Material=Polymer, Keyed=No, Length=4.67mm, Manufacturer URL=http://www.te.com/, Mating Alignment=No(Without), Mating Connector Lock=No(Without), Mating Post Length=0.23inch, Mount=ThroughHole, Mounting Technology=ThroughHole, Number of Contacts=2, Number of Positions=2, Number of Rows=1, Orientation=Straight, Package Reference=5-146280-2, Packaging=Carton, Panel Mount Retention=No(Without), PCB Mount Retention=Without, PCB Mounting Orientation=Vertical, PCB Thickness=0.063inch, Pitch=2.54mm, Radiation Hardening=No, RoHSCompliant=true, Row Spacing=2.54mm, Selectively Loaded=No(Without), Stabilizers=No(Without), Termination=ThroughHole, Termination Post Length=0.12inch
R1 R2 R3 R4 R5 R6 R7 R8 R9 R10 R11 R12 R13 R14 R15 R16 R17 R18 R19: library part CMP-2000-03820-1, Manufacturer="Vishay Dale", Part Number=CRCW0603100KFKEA
TP1 TP3 TP5 TP7 TP9 TP11 TP13 TP15 TP17 TP18 TP19 TP21 TP23 TP24 TP25: library part CMP-2000-05182-1, "Test Point, White, 1-Pin THD, RoHS, Bulk", Color=White, Manufacturer=KeystoneElectronics, Brand=KeystoneElectronics, Contact Material=PhosphorBronze, Datasheet URL=https://ciiva.com/datasheet-click-2917627?src=ciiva&sig=bd195616, Datasheet Version="Rev. G, 12/2008", Length=7.62mm, Manufacturer URL=http://www.keyelco.com/, Material=Nylon, Mounting Hole Size=1mm, Outside Diameter=2.54mm, Packaging=Bulk, Plating=Silver, Product=TestPoints, Product Category=CircuitBoardHardware-PCB, RoHS=True, Type=Miniature
TP2 TP4 TP6 TP8 TP10 TP12 TP14 TP16 TP20 TP22: library part CMP-2000-05181-1, "Test Point, Black, 1-Pin THD, RoHS, Bulk", Alternate Color="5004K-ND / -TESTPOINTPCMINI.040\"DYELLOW / 5003K-ND / -TESTPOINTPCMINI.040\"DORANGE / 5002K-ND / -TESTPOINTPCMINI.040\"DWHITE / 5000K-ND / -TESTPOINTPCMINI.040\"DRED", Color=Black, Manufacturer=Keystone, Standard Package=100, Catalog Drawings=5000Series, Category=TestandMeasurement, Datasheet URL=https://ciiva.com/datasheet-click-2917627?src=ciiva&sig=bd195616, Datasheet Version="Rev. G, 12/2008", Family=TestPoints, Kits="DKTGRS232C-KIT-ND / -TTLCONVERTER", Manufacturer URL=http://www.keyelco.com/, Material=Base,Nylon46,UL94V-0, Mounting Type="0.040\"(1.02mm)HoleDiameter", Online Catalog=ColorCodedTestPoints, Other Names=5001K, Packaging=Bulk, RoHS Information=RoHSComplianceStatement, Series=THM, Terminal="0.010\"x0.020\"(0.25mmx0.51mm)PhosphorBronzeWire,SilverPlated", Type=PCTestPoint,Miniature
U1: library part CMP-0003-01500-1, "Serial Out, Low Power with Built-In Conversion Clock and 8 x FIFO, 4 Channel, -40 to 85 degC, 20-pin SOIC (DW20), Green (RoHS & no Sb/Br)", Analog Voltage AV/DD(Max)(V)=5.5, Analog Voltage AV/DD(Min)(V)=4.75, Manufacturer="Texas Instruments", # Input Channels=4, Architecture=SAR, Code_JEDEC=MO-013, ComponentLink1Description="Manufacturer URL", ComponentLink1URL=http://www.ti.com/, ComponentLink2Description=Datasheet, ComponentLink2URL=http://www.ti.com/general/docs/lit/getliterature.tsp?genericPartNumber=TLC2574&fileType=pdf, ComponentLink3Description="Package Specification", ComponentLink3URL=http://www.ti.com/lit/ml/mpds173a/mpds173a.pdf, DatasheetVersion=SLAS262C, Digital Supply(Max)(V)=5.5, Digital Supply(Min)(V)=2.7, Eco-Plan="Green (RoHS & no Sb/Br)", ENOB(Bits)=11.7, INL(Max)(+/-LSB)=1, Interface="Serial SPI", Mounting Technology="Surface Mount", PackageDescription="20-Pin Plastic Small Outline, Body 12.8 x 7.5 mm, Pitch 1.27 mm", PackageReference=DW20, PackageVersion="4040000-4/G, 01/2011", PartNumber=TLC2574IDW, Resolution(Bits)=12, Sample Rate (max)(SPS)=200K, SFDR(dB)=83, SINAD(dB)=72, SNR(dB)=72, SubFamily="Precision ADC (<=10MSPS)"
U2 U3: library part CMP-0859-00129-4, "IC BUF NON-INVERT 5.5V SOT23-5", Ambient Temperature Range High=+125°C, Ambient Temperature Range Low=-40°C, Manufacturer="Texas Instruments", Max Junction Temp=+150°C, Max Supply Voltage=5.5V, Min Supply Voltage=1.65V, Nominal Supply Current=10uA, Package=DBV0005A, Temperature="-40°C to +125°C", Automotive=No, Category=IC, ComponentLink2Description=Datasheet, ComponentLink2URL=http://www.ti.com/lit/ds/symlink/sn74lvc1g07.pdf, Device Class L1="Integrated Circuits (ICs)", Device Class L2="Logic ICs", Device Class L3=Buffers, Digikey Description="IC BUF NON-INVERT 5.5V SOT23-5", Height=1.45mm, Lead Free=Yes, Logic Function Desc=Non-Inverting, Manufacturer Part Number=SN74LVC1G07DBVT, Mouser Description="Buffers & Line Drivers SNGL Buffer/Driver", Number Of Circuits=1, Number Of Inputs=1, Number Of Outputs=1, Octopart=https://octopart.com/sn74lvc1g07dbvt-texas+instruments-1006798, Propagation Delay=4ns, RoHS=TRUE, Standoff Height=0mm, Temperature Range High=+125°C, Temperature Range Low=-40°C
U4: library part CMP-0004-01174-1, "16-Bit, Quad Channel, Ultralow Glitch, Voltage Output Digital to Analog Converter, -40 to 105 degC, 16-pin SOP (PW16), Green (RoHS & no Sb/Br)", Manufacturer="Texas Instruments", Code_JEDEC=MO-153, ComponentLink1Description="Manufacturer URL", ComponentLink1URL=http://www.ti.com/, ComponentLink2Description=Datasheet, ComponentLink2URL=http://www.ti.com/general/docs/lit/getliterature.tsp?genericPartNumber=DAC8555&fileType=pdf, ComponentLink3Description="Package Specification", ComponentLink3URL=http://www.ti.com/lit/ml/mpds361/mpds361.pdf, DAC Channels=4, DatasheetVersion=SLAS475B, DNL(Max)(+/-LSB)=1, Eco-Plan="Green (RoHS & no Sb/Br)", Interface="Serial SPI", Mounting Technology="Surface Mount", PackageDescription="16-Pin Plastic Small Outline, Body 5 x 4.4 mm, Pitch 0.65 mm", PackageReference=PW16, PackageVersion="4040064-4/G, 02/2011", PartNumber=DAC8555IPWG4, Resolution(Bits)=16, Settling Time(us)=10, SFDR(dB)=87, SNR(dB)=95, SubFamily="Precision DAC (=<10MSPS)"
U5: library part CMP-0055-01394-3, "RRIO, High Output Current & Unlimited Cap Load Op Amp, 8-pin Mini SOIC", Manufacturer="Texas Instruments", Package Reference=DGK0008A, PackageTopMarking=ZXTT*A60, PowerWise=N, Code_JEDEC=MO-187-AA, ComponentLink1Description="Datasheet URL", ComponentLink1URL=http://www.ti.com/general/docs/lit/getliterature.tsp?genericPartNumber=LM8272&fileType=pdf, CompType=Amplifiers, PackageDescription="MINI SOIC, .118 x .118 x .034in, 8 Lead, .0256in Pitch", PinCount=8, RoHS=N
U6 U9: library part CMP-0062-01707-3, "3-Terminal Adjustable Regulator, 4-pin SOT-223, Pb-Free", Manufacturer="Texas Instruments", PackageTopMarking=XYTT*N01A, PowerWise=N, Code_IPC=SOT223-4, Code_JEDEC=TO-261-AA, ComponentLink1Description="Datasheet URL", ComponentLink1URL=http://www.ti.com/general/docs/lit/getliterature.tsp?genericPartNumber=LM317-N&fileType=pdf, CompType="LDO IC", PackageDescription="Molded SOT-223, 6.50 x 3.56 x 1.6mm Body, 4 Lead, 2.3mm Pitch", PackageReference=DCY0004A, PinCount=4, RoHS=Y
U7 U8: library part CMP-07123-000002-1, "IC INDCT LOAD DRVR INDUST SOT23", Ambient Temperature Range High=+125°C, Ambient Temperature Range Low=-40°C, Manufacturer="ON Semiconductor", Max Junction Temp=+150°C, Max Power Dissipation=225mW, Max Supply Voltage=60V, Output Current=150mA, Output Voltage=48V, Package=318-08, Temperature="-40°C to +150°C", Automotive=No, Category=IC, ComponentLink2Description=Datasheet, ComponentLink2URL=https://www.onsemi.com/pub/Collateral/NUD3160-D.PDF, Device Class L1="Integrated Circuits (ICs)", Device Class L2="Power Management ICs", Device Class L3="Gate Drivers", Digikey Description="IC INDCT LOAD DRVR INDUST SOT23", Fall Time=622ns, Footprint Url=https://www.onsemi.com/pub/Collateral/318-08.PDF, Height=1.11mm, Lead Free=Yes, Manufacturer Part Number=NUD3160LT1G, Mouser Description="MOSFET 61V Industrial Load Driver", Number Of Drivers=1, Number Of Outputs=1, Octopart=https://octopart.com/nud3160lt1g-on+semiconductor-470723, Propagation Delay=1160ns, Rise Time=600ns, RoHS=TRUE, Standoff Height=0.01mm, Temperature Range High=+150°C, Temperature Range Low=-40°C
VR1 VR2: library part CMP-1747-00001-1, "Square Trimpot(R) Trimming Potentiometer, 10 KOhm, +/- 10%, 0.5 W, -55 to 125 degC, 3-Pin THD, RoHS, Tube", Case Code (Imperial)=0603, Case Code (Metric)=1608, Max Operating Temperature="155 degC", Min Operating Temperature="-55 degC", Package Quantity=5000, Power Rating="100 mW", Resistance="120 Ohm", Tolerance=1%, Type (Resistor)="Thick Film", Voltage Rating="75 V", Case\Package=0603, ComponentLink1Description="Manufacturer URL", ComponentLink1URL=http://www.bourns.com/, ComponentLink2Description=Datasheet, ComponentLink2URL=http://www.bourns.com/docs/Product-Datasheets/3296.pdf, DatasheetVersion=May-16, Height="0.45 mm", Length="1.55 mm", Mount="Surface Mount", PackageDescription="3-Pin Through Hole Device, Body 9.53 x 4.83 mm, Pitch 2.54 mm", PackageReference=3296W, Packaging="Tape and Reel", Pins=2, Radiation Hardening=No, REACH SVHC=Unknown, RoHSCompliant=true, Weight="7.1E-05 oz", Width="0.85 mm"

## Free pads (board coordinates)
  round 250 hole 150: ""(1150,1150) ""(1150,3850) ""(3850,1150) ""(3850,3850)

## Via types
v1: diameter 28, hole 14, Top Layer to Bottom Layer, tented both sides, 94 vias

## Nets (pads, with @x,y where several pads share a name; then routed paths per layer and width w, separated by ;. In a path a pad name is that pad's centre, name@x,y a point inside that pad or via, vN(x,y) a via of type N, cw(c..) or ccw(c..) an arc to the next point about the centre after c; other vN are vias at no path point)
ADC_A0: JP1.1 R2.2 TP1.1 | length 907.6
  Top Layer w12: R2.2 3034.57,2929.57 TP1.1
  Top Layer w25: TP1.1 3345,2850 JP1.1
ADC_A0_RC: C6.1 R2.1 U1.9 | length 1495.5
  Top Layer w12: U1.9 2380.35,2100 2490.35,1990 v1(2664.67,1990) ; C6.1 v1(2920.98,2641.02)
  Top Layer w25: C6.1 R2.1
  Bottom Layer w12: v1(2664.67,1990) 2853,1990 2883,2020 2883,2603.03 v1(2920.98,2641.02)
ADC_A1: JP1.3 R3.2 TP3.1 | length 819.7
  Top Layer w12: R3.2 3034.57,2511.1 3075,2551.54 3075,2820 TP3.1
  Top Layer w25: TP3.1 3295,2750 JP1.3
ADC_A1_RC: C7.1 R3.1 U1.10 | length 1349.7
  Top Layer w12: U1.10 2372.68,2050 2462.68,1960 v1(2612.32,1960) ; v1(2920.98,2458.43) C7.1
  Top Layer w25: C7.1 R3.1
  Bottom Layer w12: v1(2612.32,1960) 2879.08,1960 2920.98,2001.91 v1(2920.98,2458.43)
ADC_A2: JP1.5 R4.2 TP5.1 | length 1008.9
  Top Layer w12: R4.2 3034.57,2151.26 3060,2176.69 3060,2441.89 3100.67,2482.56 3100.67,2695.67 TP5.1
  Top Layer w25: TP5.1 3245,2650 JP1.5
ADC_A2_RC: C8.1 R4.1 U1.11 | length 476.3
  Top Layer w12: U1.11 2710.36,2050 2768.71,2108.35 2883,2108.35 2920.98,2146.34 C8.1
  Top Layer w25: C8.1 R4.1
ADC_A3: JP1.7 R5.2 TP7.1 | length 924.4
  Top Layer w12: R5.2 3034.57,2068.97 3097.94,2132.34 3097.94,2426.28 3154.81,2483.15 3154.81,2590.19 TP7.1
  Top Layer w25: TP7.1 3156.18,2595 3201.18,2550 JP1.7
ADC_A3_RC: C9.1 R5.1 U1.12 | length 641.6
  Top Layer w12: U1.12 2503.61,2100 2496.58,2092.97 2496.58,2029.33 2505.91,2020 2876.93,2020 2920.98,2064.05 C9.1
  Top Layer w25: C9.1 R5.1
ADC_C\S\: J1.4 U1.8 | length 2012.5
  Top Layer w12: J1.4 1390,3250 1520,3120 1740,3120 1900,2960 1900,2590 1940,2550 2260,2550 2327.68,2482.32 2327.68,2200 2277.68,2150 U1.8
ADC_C\S\T\A\R\T\: J1.2 U1.20 | length 1767
  Top Layer w12: J1.2 1400,3300 1540,3160 1760,3160 1940,2980 1940,2762.68 2022.68,2680 2330,2680 2370,2640 2370,2582.68 2452.68,2500 U1.20
ADC_COMP: C3.1 U1.17 | length 123
  Top Layer w16: U1.17 2677.2,2350.01 C3.1
ADC_EOC/I\N\T\: U1.4 U3.2 | length 732.2
  Top Layer w12: U3.2 1710,2675 1740,2645 1740,2520 1910,2350 U1.4
ADC_EOC/I\N\T\_BUF: J2.2 R7.1 U3.4 | length 309.2
  Top Layer w16: J2.2 1400,2675 1422.64,2697.64 R7.1 1502.95,2697.64 1517.72,2712.4 U3.4
ADC_FS: J1.8 U1.2 | length 1419.9
  Top Layer w12: J1.8 1370,3150 1480,3040 1700,3040 1820,2920 1820,2562.28 1932.28,2450 U1.2
ADC_REFP: C1.1 C2.1 C10.1 R8.1 R9.1 TP24.1 U1.15 | length 2027.4
  Top Layer w12: R9.1 R8.1 2134.73,1482.37 2134.73,1509.73 2150,1525 v1(2445.68,1525)
  Top Layer w16: v1(2477.68,2250) U1.15 2601.19,2250 2640.25,2289.06 C1.1@2675.71,2289.06 ; C1.1 2771.06,2289.06 C10.1 C2.1
  Bottom Layer w12: TP24.1 2425,1504.32 2480,1559.32 2480,2040 2510,2070 2510,2217.68 v1(2477.68,2250)
ADC_REFP_POT: R9.2 U5.3 VR1.2 | length 1122.8
  Top Layer w16: U5.3 2206.89,1412.2 2172.64,1377.95 R9.2 2172.64,1372.05 2178.42,1366.27 2181.37,1366.27 2292.35,1255.29 2994.71,1255.29 VR1.2
ADC_REFP_POT_BUF: R8.2 U5.1 U5.2 | length 150.8
  Top Layer w12: R8.2 2172.64,1472.05 2181.3,1463.39 U5.1 U5.2
ADC_SCLK: J1.6 R1.1 | length 1275.8
  Top Layer w12: J1.6 1380,3200 1500,3080 1720,3080 1860,2940 1860,2580 1940,2500 R1.1
ADC_SCLK_R: R1.2 U1.1 | length 100.2
  Top Layer w12: R1.2 U1.1
ADC_SDI: J1.10 U1.3 | length 1415.4
  Top Layer w12: J1.10 1360,3100 1460,3000 1675,3000 1780,2895 1780,2545 1925,2400 U1.3
ADC_SDO: U1.5 U2.2 | length 578.3
  Top Layer w12: U2.2 1769.68,2430.32 1900,2300 U1.5
ADC_SDO_BUF: J2.4 R6.1 U2.4 | length 415
  Top Layer w16: J2.4 1400,2625 1425,2600 1425,2525 1497.05,2452.95 R6.1 1502.95,2452.95 1517.72,2467.72 U2.4
AVDD: C4.1 C13.1 C15.1 C16.1 C22.1 D2.2 P2.1 R12.2 R13.2 R18.2 TP17.1 U1.13 U1.19 U4.4 U5.8 U6.2 VR1.1 VR2.1 | length 2236.2
  Top Layer w16: C13.1 2455.71,1601.97 2415,1642.68 v1(2415,1762.2) U4.4 ; U5.8 2459.52,1464.24 2486,1464.24 2496.75,1475 v1(2500,1475) ; U1.13 2582.4,2150 2619.65,2112.75 2669.93,2112.75 C4.1 ; U1.19 2650.24,2450 2675.71,2475.47 C22.1
  Top Layer w25: v1(2430,2150) v1(2477.68,2150) U1.13 ; v1(2432.68,2450) v1(2477.68,2450) U1.19 ; v1(2432.68,2620) C15.1 ; v1(2432.68,2710) C16.1 ; R18.2 2602.36,3272.05 2575,3244.69 D2.2 2575,3077.05 2577.05,3075 U6.2 v1(2795.47,3075) ; v1(2795.47,3040) v1(2795.47,3075) ; P2.1 2795.47,3605.47 v1(2795.47,3075) ; R13.2 v1(3650,1932.09) ; R12.2 v1(3650,3164.96)
  Top Layer w50: TP17.1 2800,3816.51 2840,3776.51 P2.1
AVDD_FB: R18.1 R19.2 U6.1 | length 214.1
  Top Layer w16: R19.2 R18.1 2647.64,3211.02 2693.11,3165.55 U6.1
AVDD_IN: C23.1 D2.1 P2.2 R17.2 TP23.1 U6.3 | length 1441
  Top Layer w25: D2.1 2575,2974.1 2585.35,2984.45 U6.3 U6.3@2714.76,2984.45 ; C23.1 2795.47,2876.97 2719.98,2952.46 2719.98,2979.23 U6.3@2714.76,2984.45 ; P2.2 2854.53,3564.53 2854.53,3185.83 ; R17.2 2943.11,3277.36 2941.83,3276.08 2941.83,3273.13 2854.53,3185.83 ; U6.3@2714.76,2984.45 2823.99,2984.45 2854.53,3014.99 2854.53,3185.83
  Top Layer w50: P2.2 2940,3781.51 2975,3816.51 TP23.1
DAC_DIN: J3.6 U4.11 | length 1041.2
  Top Layer w12: J3.6 1875,1950 2011.61,1813.39 U4.11
DAC_E\N\A\B\L\E\: J3.12 U4.15 | length 1038.1
  Top Layer w12: J3.12 1423.22,1800 1443.22,1820 1780,1820 1888.98,1711.02 U4.15
DAC_LDAC: J3.14 U4.16 | length 1037.9
  Top Layer w12: J3.14 1434.57,1750 1466.57,1782 1753,1782 1849.57,1685.43 U4.16
DAC_R\S\T\: J3.8 U4.13 | length 1041.7
  Top Layer w12: J3.8 1837.2,1900 1975,1762.2 U4.13
DAC_REFP: C19.1 C20.1 C21.1 R10.1 R11.1 TP25.1 U4.3 | length 1150.7
  Top Layer w12: U4.3 2464.09,1736.61 2457.38,1729.91 2456.74,1729.91 2445.68,1718.85 2445.68,1668.89 2464.57,1650 2556.26,1650 2622.64,1583.62 2622.64,1377.36 R11.1@2625,1375 ; R11.1 R11.1@2625,1375 ; v1(2675,1375) R11.1@2625,1375
  Top Layer w16: U4.3 2589.17,1736.61 2598.03,1745.47 C19.1 2698.03,1745.47 C21.1 C20.1
  Bottom Layer w12: TP25.1 2650,1350 v1(2675,1375)
DAC_REFP_POT: R11.2 U5.5 VR2.2 | length 743.1
  Top Layer w12: U5.5 2568.7,1386.61 R11.2@2577.36,1377.95
  Top Layer w16: R11.2@2577.36,1377.95 2581.3,1374.02 2581.3,1325 2606.3,1300 2925,1300 VR2.2
DAC_REFP_POT_BUF: R10.2 U5.6 U5.7 | length 161.4
  Top Layer w12: U5.6 U5.7 2543.11,1437.8 2577.36,1472.05 R10.2
DAC_RSTSEL: J3.10 U4.14 | length 1031.6
  Top Layer w12: J3.10 1820,1850 1933.39,1736.61 U4.14
DAC_S\Y\N\C\: J3.2 U4.9 | length 1061.5
  Top Layer w12: J3.2 1925,2050 2110.43,1864.57 U4.9
DAC_SCLK: J3.4 U4.10 | length 1051.3
  Top Layer w12: J3.4 1900,2000 2061.02,1838.98 U4.10
DAC_VOUTA: JP1.9 TP9.1 U4.1 | length 1877.7
  Top Layer w12: U4.1 2572.63,1685.43 2608.06,1650 3125,1650 3295.03,1820.03 3295.03,2160.09 3150,2305.12 TP9.1
  Bottom Layer w25: TP9.1 3205,2450 JP1.9
DAC_VOUTB: JP1.11 TP11.1 U4.2 | length 1647.3
  Top Layer w12: U4.2 2593.11,1711.02 2613.83,1690.3 3090.3,1690.3 3250,1850 3250,2150 3155,2245 TP11.1
  Bottom Layer w25: TP11.1 3255,2350 JP1.11
DAC_VOUTC: JP1.13 TP13.1 U4.7 | length 1317.3
  Top Layer w12: U4.7 2484.9,1839.32 2448.81,1839.32 2431.32,1856.81 2431.32,1866.75 2479.57,1915 3044.49,1915 3150,2020.51 TP13.1
  Bottom Layer w25: TP13.1 3305,2250 JP1.13
DAC_VOUTD: JP1.15 TP15.1 U4.8 | length 1121.3
  Top Layer w12: U4.8 2485.82,1865.15 2506.49,1865.15 2526.34,1885 3090,1885 TP15.1 TP15.1@3136.73,1945
  Bottom Layer w25: TP15.1 3355,2150 JP1.15
DC_IN: J4.1 P1.2 R16.1 R17.1 TP21.1 | length 169.7
  Top Layer w25: R16.1 v1(2421.06,3370) v1(2460,3370) ; v1(2910,3370) v1(2946.06,3370) R17.1
DVDD: C5.1 C11.1 C12.1 C14.1 C17.1 C18.1 D1.2 R6.2 R7.2 R14.2 TP19.1 U1.7 U2.5 U3.5 U4.12 U9.2 | length 2365.4
  Top Layer w16: R6.2 1502.95,2407.68 1517.72,2392.91 U2.5 1573.82,2328.94 1595.47,2307.28 C11.1 1594.49,2306.3 1553.15,2306.3 v1(1552.17,2307.28) ; R7.2 1502.95,2652.36 1517.72,2637.6 U3.5 1573.82,2573.62 1595.47,2551.97 C12.1 1594.49,2550.98 1553.15,2550.98 v1(1552.17,2551.97) ; U4.12 v1(2325,1787.8) 2325,1630.71 2304.01,1609.72 2302.04,1609.72 2294.29,1601.97 C14.1
  Top Layer w25: v1(1950,3040) v1(1950,3077.05) 1950.57,3077.62 2049.43,3077.62 D1.2@2050,3077.05 ; C17.1 v1(2102.68,2620) ; R14.2 2077.36,3272.05 2050,3244.69 D1.2 D1.2@2050,3077.05 ; v1(2077.68,2120) v1(2077.68,2158.35) C5.1 2079.65,2195.47 2084.17,2200 U1.7 ; C18.1 v1(2322.68,2620) ; TP19.1 2450,3575 2250,3375 2250,3091.94 2233.06,3075 U9.2 2052.05,3075 D1.2@2050,3077.05
DVDD_FB: R14.1 R15.2 U9.1 | length 214.1
  Top Layer w16: R15.2 R14.1 2122.64,3211.02 2168.11,3165.55 U9.1
DVDD_IN: C24.1 D1.1 R16.2 TP18.1 U9.3 | length 1527.7
  Top Layer w25: D1.1 2050,2974.1 2060.35,2984.45 U9.3 U9.3@2189.76,2984.45 ; C24.1 2270.47,2876.97 2194.98,2952.46 2194.98,2979.23 U9.3@2189.76,2984.45 ; R16.2 2418.11,3277.36 2416.83,3276.08 2416.83,3273.13 2313.78,3170.08 ; TP18.1 2625,3675 2313.78,3363.78 2313.78,3170.08 ; U9.3@2189.76,2984.45 2285.24,2984.45 2313.78,3012.99 2313.78,3170.08
GND: C1.2 C2.2 C3.2 C4.2 C5.2 C6.2 C7.2 C8.2 C9.2 C10.2 C11.2 C12.2 C13.2 C14.2 C15.2 C16.2 C17.2 C18.2 C19.2 C20.2 C21.2 C22.2 C23.2 C24.2 J1.1 J1.3 J1.5 J1.7 J1.9 J1.11 J1.13 J1.15 J2.1 J2.3 J2.5 J2.6 J2.7 J2.8 J2.9 J2.10 J2.11 J2.12 J2.13 J2.14 J2.15 J2.16 J3.1 J3.3 J3.5 J3.7 J3.9 J3.11 J3.13 J3.15 J5.1 JP1.2 JP1.4 JP1.6 JP1.8 JP1.10 JP1.12 JP1.14 JP1.16 MH1.PAD MH2.PAD MH3.PAD MH4.PAD P1.1 pad.@1150,1150 R15.1 R19.1 TP2.1 TP4.1 TP6.1 TP8.1 TP10.1 TP12.1 TP14.1 TP16.1 TP20.1 TP22.1 U1.6 U1.14 U1.16 U1.18 U2.3 U3.3 U4.5 U4.6 U5.4 U7.2 U8.2 VR1.3 VR2.3 | length 2117.2
  Top Layer w16: v1(1625,2475) 1628.25,2475 1631.72,2471.53 1672.37,2471.53 U2.3 ; v1(1625,2725) 1628.25,2725 1637.03,2716.21 1672.37,2716.21 U3.3 ; C11.2 v1(1694.01,2305.32) ; C12.2 1654.73,2550.2 1693.6,2550.2 v1(1693.8,2550.41) ; v1(2025,3350) R15.1 ; C5.2 2080.75,2251.46 2199.05,2251.46 U1.6 2269.43,2250 2274.43,2255 v1(2277.68,2255) ; v1(2200,1600) C14.2 ; U5.4 2343.37,1386.61 2346.75,1390 v1(2350,1390) ; C24.2 v1(2375,2875) ; v1(2415,1800) v1@2418.25,1800 ; v1(2477.68,2200) U1.14 ; v1(2477.68,2305) 2480.92,2305 2485.92,2300 U1.16 ; U4.5 2430.45,1787.8 v1@2418.25,1800 ; U4.6 2431.63,1813.39 v1@2418.25,1800 ; C13.2 2514.98,1600.22 2553,1600.22 v1(2553.22,1600.44) ; v1(2550,3350) R19.1 ; U1.18 2619.43,2400 2624.43,2405 C3.2@2688.36,2405 ; C19.2 v1(2600,1843.85) ; v1@2627.21,2229.53 v1(2627.68,2230) C1.2 2768.71,2230 C10.2 C2.2 ; v1(2627.68,2180) 2643.62,2164.06 C4.2 ; v1(2627.68,2530) 2627.68,2534.53 C22.2 ; C21.2 v1(2700,1857.68) ; C20.2 v1(2800,1857.68) ; v1(2811.93,2066.02) C9.2 ; v1(2811.93,2148.31) C8.2 ; v1(2811.93,2508.15) C7.2 ; v1(2811.93,2591.02) C6.2 ; C23.2 v1(2900,2875) ; v1(3487.4,1800) U8.2 ; v1(3487.4,3025) U7.2
  Top Layer w25: v1(1942.68,2620) C17.2 ; v1(2162.68,2620) C18.2 ; C15.2 v1(2592.68,2620) ; C16.2 v1(2592.68,2710)
  other v1: 1119.88,1700 1119.88,1750 1119.88,1800 1119.88,1850 1119.88,1900 1119.88,1950 1119.88,2000 1119.88,2050 1119.88,2325 1280.12,2325 1119.88,2375 1280.12,2375 2627.68,2405 1119.88,2425 1280.12,2425 1119.88,2475 1280.12,2475 1119.88,2525 1280.12,2525 1119.88,2575 1280.12,2575 1119.88,2625 1119.88,2675 1119.88,2950 1119.88,3000 1119.88,3050 1119.88,3100 1119.88,3150 1119.88,3200 1119.88,3250 1119.88,3300
LED_ADC: J1.16 U7.1 | length 4158.3
  Top Layer w12: J1.16 1280.12,2910.12 1270,2900 1050,2900 1030,2920 1030,3330 1175,3475 1175,3640 1465,3930 1820,3930 1920,3830 2310,3830 2405,3925 3025,3925 3070,3880 3070,3610 3412.6,3267.4 U7.1
LED_ADC_DRAIN: DS1.2 U7.3 | length 125.8
  Top Layer w16: U7.3 3450.98,3140.35 3574.02,3140.35 DS1.2
LED_ADC_MID: DS1.1 R12.1 | length 82.7
  Top Layer w16: DS1.1 3628.35,3058.66 3647.05,3077.36 R12.1
LED_DAC: J3.16 U8.1 | length 3313
  Top Layer w12: J3.16 1280.12,1333.27 1588.39,1025 3200,1025 3300,1125 3300,1721.06 3412.6,1833.66 U8.1
LED_DAC_DRAIN: DS2.2 U8.3 | length 125.8
  Top Layer w16: U8.3 3450.98,1915.35 3574.02,1915.35 DS2.2
LED_DAC_MID: DS2.1 R13.1 | length 82.7
  Top Layer w16: DS2.1 3628.35,1833.66 3647.05,1852.36 R13.1
pads on no net: J1.12 J1.14 U2.1 U3.1 U6.4 U9.4

## Polygon pours and split planes (outlines as drawn)
AVDD on MidLayer Lower "AVDD_L03_P001" (solid, pour order 1): 2400,1000 3900,1000 ccw(c3900,1100) 4000,1100 4000,3400 3100,3400 2400,2700
DC_IN on MidLayer Lower "DC_IN_L03_P003" (solid, pour order 3): 3025,4000 3850,4000 cw(c3850,3850) 4000,3850 4000,3447.07 3047.07,3447.07 2375,2775 1702.93,3447.07 1000,3447.07 1000,3458.25 1000,3850 cw(c1150,3850) 1150,4000
DVDD on MidLayer Lower "DVDD_L03_P002" (solid, pour order 2): 1875,1000 1875,1550 1900,1575 2325,1575 2350,1600 2350,2700 1650,3400 1000,3400 1000,1150 ccw(c1150,1150) 1150,1000
GND on MidLayer Upper "GND_L02_P000" (solid, pour order 0): 1150,4000 ccw(c1150,3850) 1000,3850 1000,1150 ccw(c1150,1150) 1150,1000 3850,1000 ccw(c3850,1150) 4000,1150 4000,3850 ccw(c3850,3850) 3850,4000

## Keep-outs
Keep-Out Layer:
  the board outline again, w1

## Silkscreen, mask and mechanical layers (free items; w line width, h text height)
Top Overlay:
  text "GND" at 1720.06,3891.36 h60
  text "DVDD" at 2377.51,3891.36 h60
  text "DIN" at 2568.28,3891.36 h60
  text "AVDD" at 2726.91,3891.36 h60
  text "AIN" at 2918.28,3891.36 h60
  text "+" at 3336.58,3803.42 h60
  text "GND" at 1043.28,3610 h60
  text "DCIN" at 1176.91,3610 h60
  text "AVDD BYP" at 2753.45,3475 h60
  text "A/D IN" at 1064.96,3350 h60
  text "GND" at 3716.56,3000 h60
  text "A/D_0" at 3220,2990 h60
  text "A/D LED" at 3471.64,2930 h60
  text "GND" at 3580,2850 h60
  text "A/D_1" at 3220,2840 h60
  text "A/D OUT" at 1064.96,2725 h60
  text "GND" at 3580,2700 h60
  text "A/D_2" at 3220,2690 h60
  text "GND" at 3580,2550 h60
  text "A/D_3" at 3220,2540 h60
  text "GND" at 3580,2350 h60
  text "D/A_A" at 3220,2340 h60
  text "GND" at 3580,2200 h60
  text "D/A_B" at 3220,2190 h60
  text "D/A IN" at 1064.96,2100 h60
  text "GND" at 3580,2050 h60
  text "D/A_C" at 3220,2040 h60
  text "D/A LED" at 3471.64,2030 h60
  text "GND" at 3716.56,1900 h60
  text "D/A_D" at 3220,1890 h60
  text "BUF" at 1975,1450 h60
  text "BUF" at 2675,1450 h60
  text "POT" at 1975,1350 h60
  text "POT" at 2675,1350 h60
  text "DAC" at 2875,1325 h60 r90
  text "ADC" at 2025,1300 h60
  text "DAC" at 2475,1300 h60
  text "EQuIP ADC/DAC Test Board" at 1325,1150 h80
  text "ADC" at 2875,1049.69 h60 r90
  text "kramnik@berkeley.edu / vlada@berkeley.edu" at 1325,1025 h60
  text "AREF" at 2351.91,1025 h60
  text "DREF" at 2576.91,1025 h60
  text "Sept. 9, 2021" at 3315,1025 h60